# EAGLE board 2015-04-22_03-29-30 (EAGLE 7.2.0)

Size 100 x 80 mm. Coordinates in mm from the lower left corner, seen from the top.
Outline: 0,0 100,0 100,80 0,80 0,0
Copper layers (1*16): Top 0.035mm / dielectric 1.5mm / Bottom 0.035mm
Design rules "default": minimum track width 10mil, minimum drill 24mil, track to track 8mil, track to pad 8mil, pad to pad 8mil, via to via 8mil, smd to smd 8mil, copper to edge 40mil, drill to drill 8mil, minimum pad ring 10mil, minimum via ring 8mil, stop-mask expansion 4mil, vias tented up to drill 0mil, thermal gap 10mil

## Footprints (pad centres in the part's own frame; a part is rotated, then mirrored left to right if it is on the bottom)
0805 = drill 0: 1 -0.902,0; 2 0.902,0
1206 = drill 0: 1 -1.499,0; 2 1.499,0
3528-21 = drill 0: 1 -1.13,0; 2 1.13,0
SMC = drill 0: 1 -3.315,0; 2 3.315,0
WB_GND = drill 0: 1 0,0
WB_CURRENT_LOAD = drill 0: 1 0,0; 2 0,0
SDR1307 = drill 0: 1 -4.623,0; 2 4.623,0
TJ7A = drill 0: 1 -3.81,-8.344; 2 -2.54,-8.344; 3 -1.27,-8.344; 4 0,-8.344; 5 1.27,-8.344; 6 2.54,-8.344; 7 3.81,-8.344; 8 0,0.152
WB_BATTERY = drill 0: 1 0,0; 2 0,0

## Placement (x,y rotation side)
CBST  10nF  [0805]  -15.24,20.32 0 top  (outside the outline)
CIN  4.7uF  [1206]  -25.4,15.24 0 top  (outside the outline)
CIN_2  4.7uF  [1206]  -15.24,17.78 0 top  (outside the outline)
CIN_3  4.7uF  [1206]  -20.32,17.78 0 top  (outside the outline)
CINX  1uF  [0805]  -20.32,20.32 0 top  (outside the outline)
COUT  100uF  [3528-21]  -25.4,17.78 0 top  (outside the outline)
CSS  39nF  [0805]  -25.4,20.32 0 top  (outside the outline)
D1  700mV  [SMC]  -17.78,15.24 0 top  (outside the outline)
GND  WB_GND  [WB_GND]  -13.97,22.86 0 top  (outside the outline)
IOUT  WB_CURRENT_LOAD  [WB_CURRENT_LOAD]  -16.51,22.86 0 top  (outside the outline)
L1  10uH  [SDR1307]  -19.05,12.7 0 top  (outside the outline)
U1  LM22679TJ-5.0/NOPB  [TJ7A]  -17.78,10.16 0 top  (outside the outline)
VIN  WB_BATTERY  [WB_BATTERY]  -19.05,22.86 0 top  (outside the outline)

## Library data of the parts
CBST = AcceleratedDesigns_Lib; CAP: 1.0E-8; ESR: 1.739; IRMS: 0.411; MANUFACTURER_NAME: Kemet; MANUFACTURER_PART_NUMBER: C0805C103K5RACTU; VDC: 50.0; VENDOR: Kemet
CIN CIN_2 CIN_3 = AcceleratedDesigns_Lib; CAP: 4.7E-6; ESR: 0.0; IRMS: 0.0; MANUFACTURER_NAME: MuRata; MANUFACTURER_PART_NUMBER: GRM31CR71H475KA12L; VDC: 50.0; VENDOR: MuRata
CINX = AcceleratedDesigns_Lib; CAP: 1.0E-6; ESR: 0.0; IRMS: 0.0; MANUFACTURER_NAME: Taiyo Yuden; MANUFACTURER_PART_NUMBER: GMK212B7105KG-T; VDC: 35.0; VENDOR: Taiyo Yuden
COUT = AcceleratedDesigns_Lib; CAP: 1.0E-4; DATASHEET_URL: %20; ESR: 0.035; IRMS: 1.4; MANUFACTURER_NAME: Panasonic; MANUFACTURER_PART_NUMBER: 8TPE100MAZB; VDC: 8.0; VENDOR: Panasonic
CSS = AcceleratedDesigns_Lib; CAP: 3.9E-8; ESR: 0.038; IRMS: 0.0; MANUFACTURER_NAME: AVX; MANUFACTURER_PART_NUMBER: 08055C393KAT2A; VDC: 50.0; VENDOR: AVX
D1 = AcceleratedDesigns_Lib; DATASHEET_URL: http://www.diodes.com/datasheets/ds13012.pdf; IO: 5.0; MANUFACTURER_NAME: Diodes Inc.; MANUFACTURER_PART_NUMBER: B560C-13-F; VENDOR: Diodes Inc.; VFATIO: 0.7; VRRM: 60.0
GND = AcceleratedDesigns_Lib; MANUFACTURER_NAME: WB_GND; MANUFACTURER_PART_NUMBER: WB_GND; POWERPORTTYPE: POWER_GROUND
IOUT = AcceleratedDesigns_Lib; MANUFACTURER_NAME: WB_CURRENT_LOAD; MANUFACTURER_PART_NUMBER: WB_CURRENT_LOAD; POWERPORTTYPE: POWER_GROUND
L1 = AcceleratedDesigns_Lib; DCR: 0.021; IDC: 5.6; L: 1.0E-5; MANUFACTURER_NAME: Bourns; MANUFACTURER_PART_NUMBER: SDR1307-100ML; VENDOR: Bourns
U1 = AcceleratedDesigns_Lib; DATASHEET_URL: http://www.ti.com/product/lm22679; FREQUENCY: 500000.0; IMAX: 5.0; MANUFACTURER_NAME: Texas Instruments; MANUFACTURER_PART_NUMBER: LM22679TJ-5.0/NOPB; MKTG_PACKAGE: NA; NSID: LM22679TJ-5.0/NOPB; PACKAGE: NA; VENDOR: Texas Instruments
VIN = AcceleratedDesigns_Lib; MANUFACTURER_NAME: WB_BATTERY; MANUFACTURER_PART_NUMBER: WB_BATTERY; POWERPORTTYPE: POWER_GROUND

## Nets
0: CIN.2 CIN_2.2 CIN_3.2 CINX.2 COUT.2 CSS.2 D1.2 GND.1 IOUT.2 U1.4 U1.8 VIN.2
1: CSS.1 U1.7
2: COUT.1 IOUT.1 L1.2 U1.6
3: CIN.1 CIN_2.1 CIN_3.1 CINX.1 U1.2 VIN.1
4: CBST.1 D1.1 L1.1 U1.1
5: CBST.2 U1.3

## Tracks (layer width: path | path; a pad name or v marks a point on that pad's centre or on a via)
0  (11 unrouted)
1  (1 unrouted)
2  (3 unrouted)
3  (5 unrouted)
4  (3 unrouted)
5  (1 unrouted)